# Altium PCB PreAvionicDesign.PcbDoc
Units mm, origin at the board's own origin, x right, y up, seen from the top; angles counter-clockwise.
Board outline 55 x 70 mm, 2 copper layers (Top Layer, Bottom Layer); 40 components, 27 nets, 185 pads, 38 vias.
Unrouted connection lines stored in the file: 2.
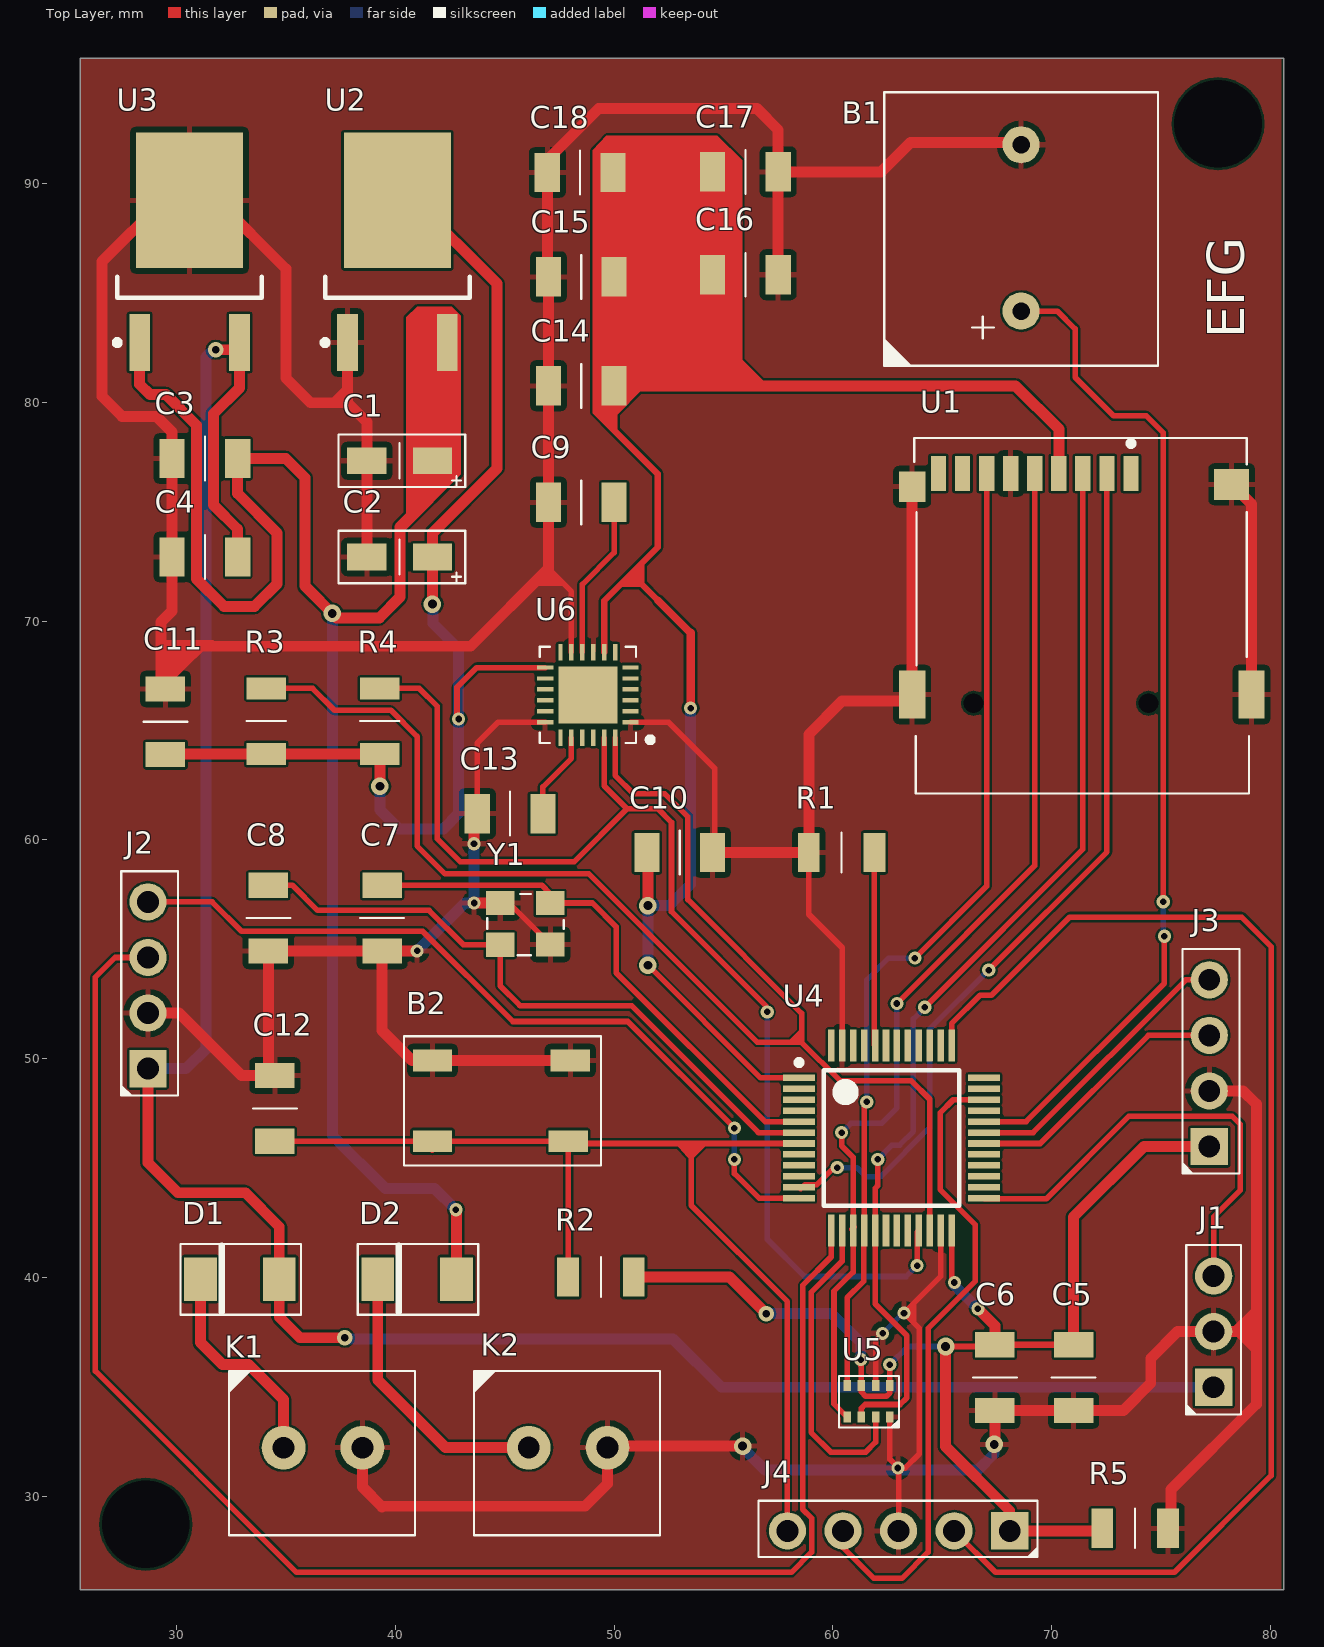
[diagram p0: Top Layer view]
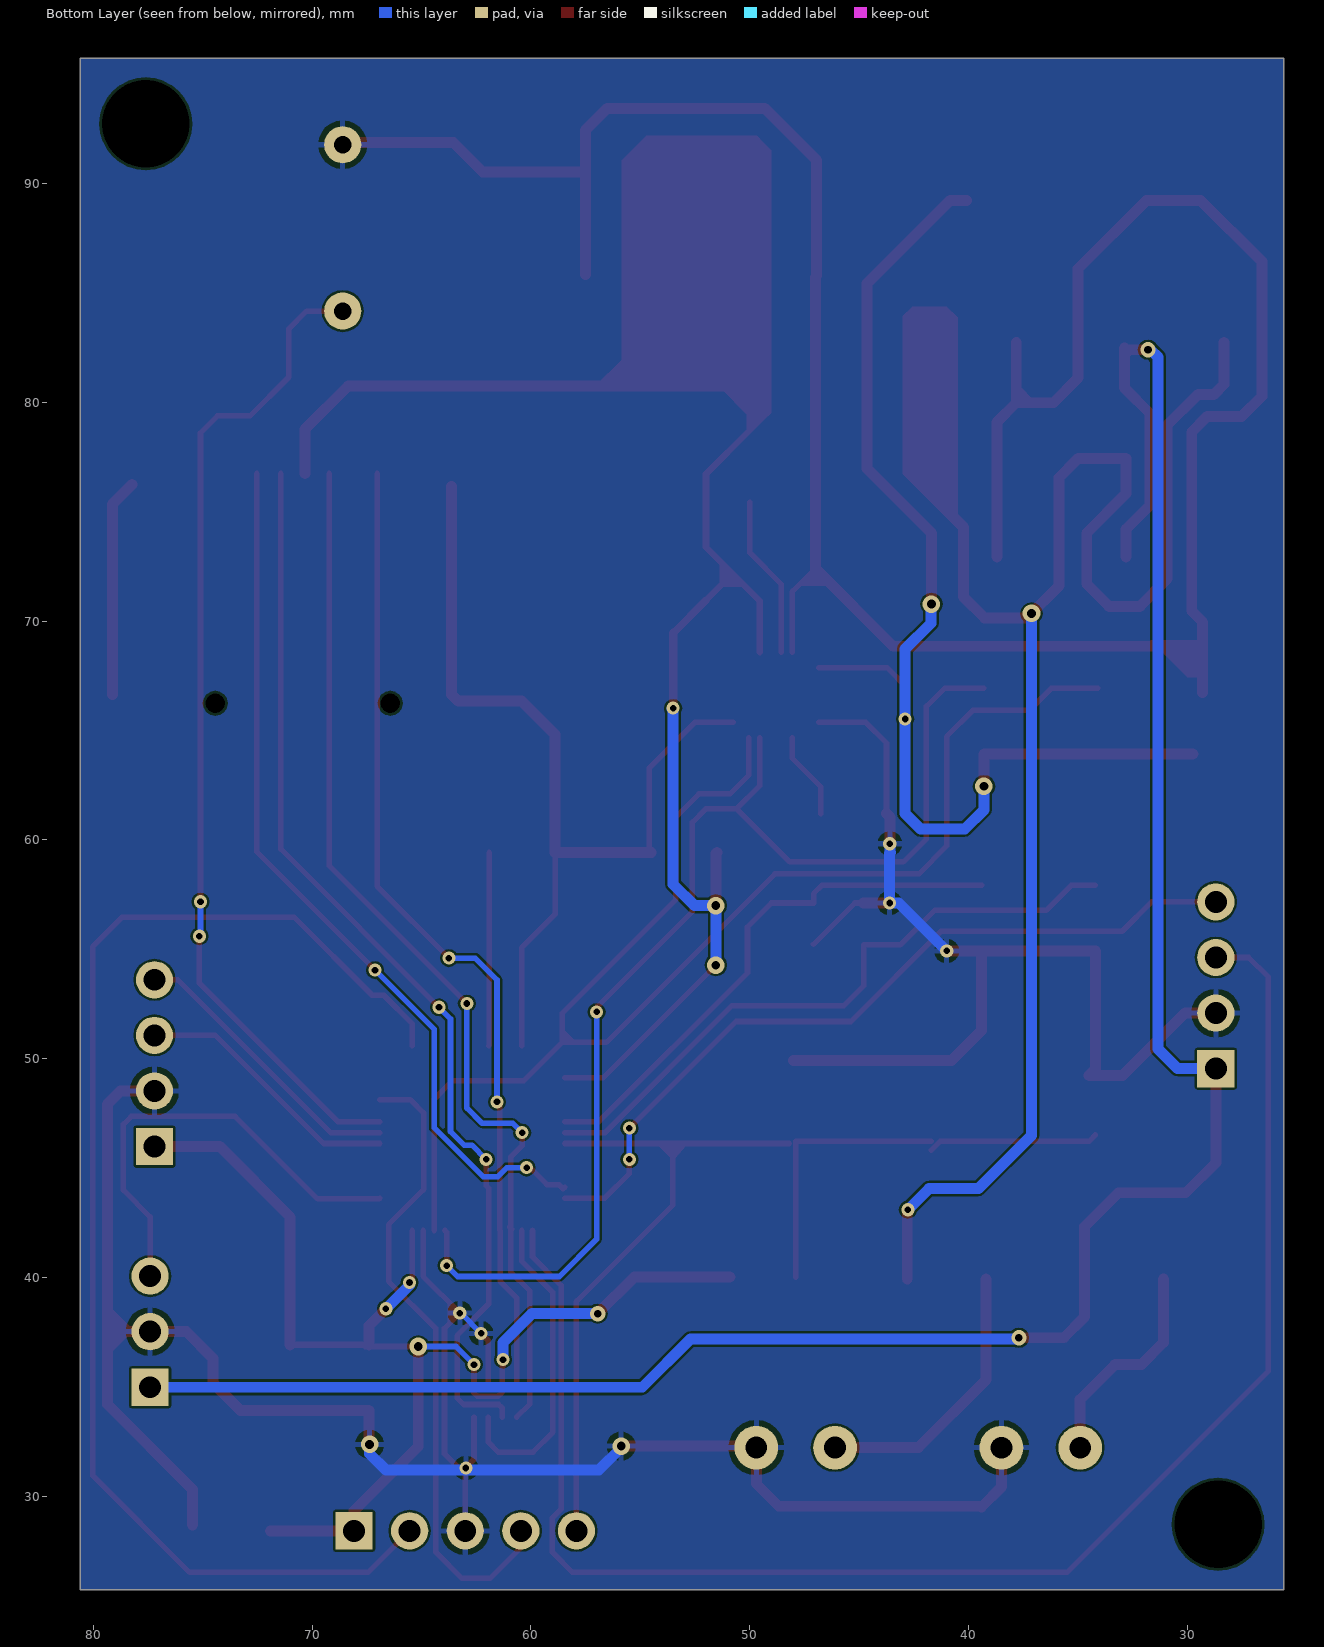
[diagram p1: Bottom Layer view, seen from below]
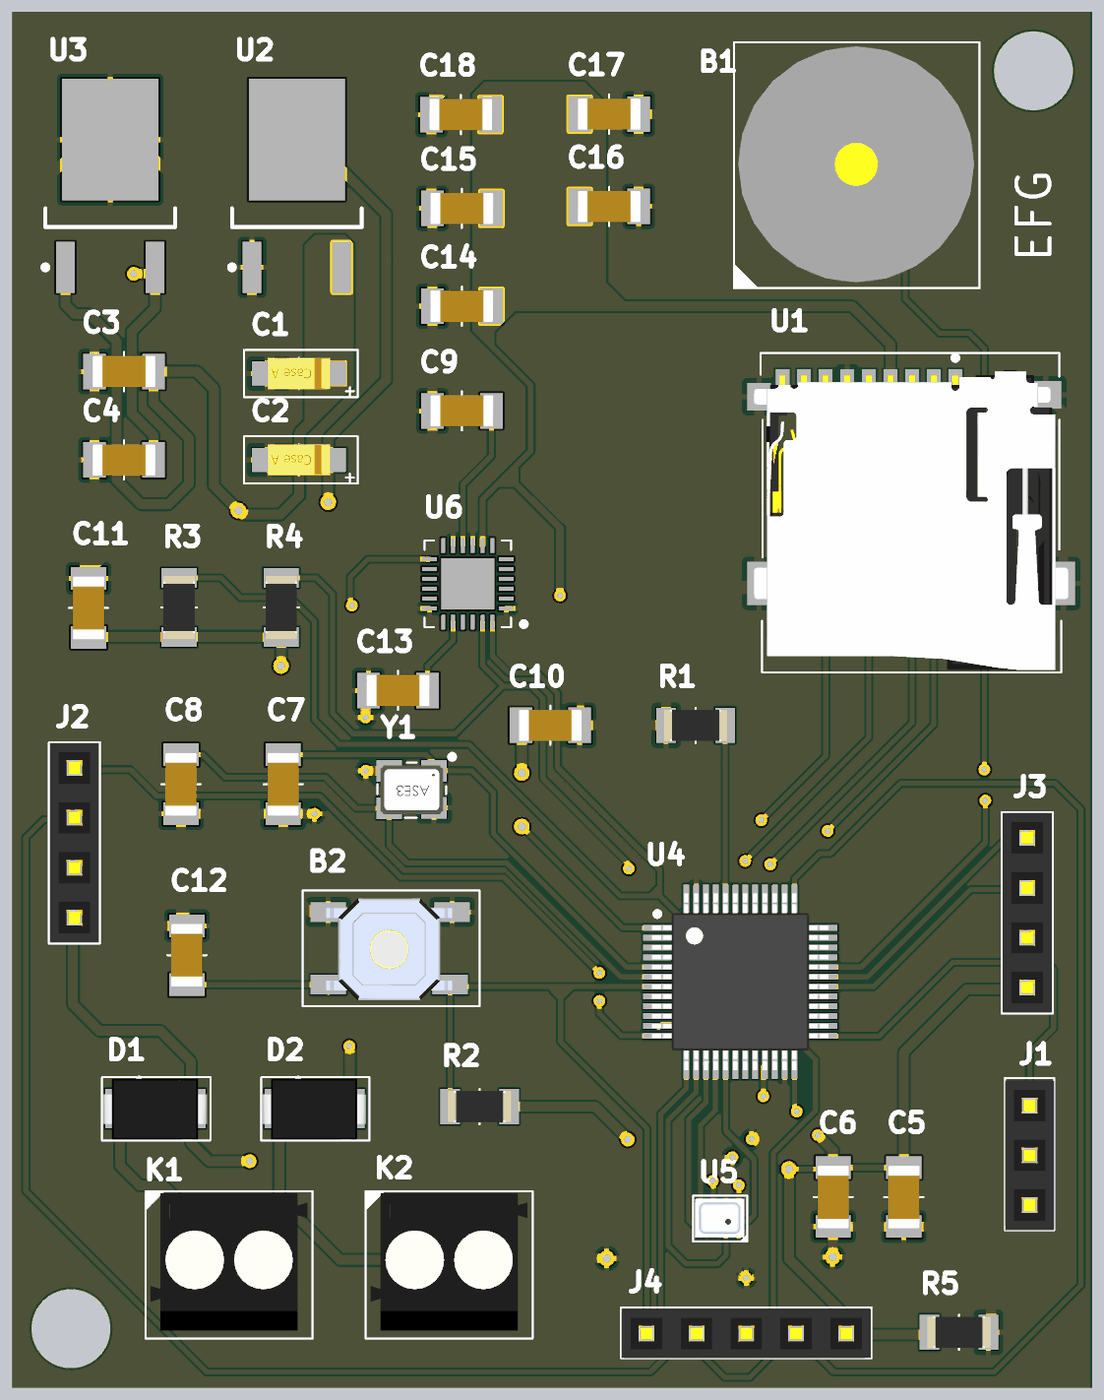
[diagram p2: 3D render of the assembled board from above, using the file's embedded part models]

## Layer stack, top to bottom
Top Solder: solder mask 0.0102, Solder Resist, Dk 3.5
Top Layer: signal copper 0.0356
Dielectric 1: dielectric 0.32, FR-4, Dk 4.8
Bottom Layer: signal copper 0.0356
Bottom Solder: solder mask 0.0102, Solder Resist, Dk 3.5

## Board outline
25.602,25.729 80.602,25.729 80.602,95.729 25.602,95.729

## Design rules (kind name [scope] priority, off if disabled: settings)
Clearance [All] p1: gap=0.1 ignorepadtopadclearanceinfootprint=FALSE except(0: Arc-Hole Track-Hole SMDPad-Hole THPad-Hole Via-Hole Fill-Hole Poly-Hole Region-Hole Text-Hole)
PolygonConnect [All] p1: connectstyle=Relief reliefconductorwidth=0.254 reliefentries=4 polygonreliefangle="90 Angle" airgapwidth=0.254
RoutingVias [All] p1: holewidth=0.3 width=0.6 viastyle="Through Hole" minholewidth=0.6 minwidth=0.3 maxholewidth=0.5 maxwidth=1
SolderMaskExpansion [All] p1: expansion=0.102
Width [All] p1: maxlimit=0.7 minlimit=0.254 preferedwidth=0.254 minimp=50.000000 maximp=50.000000 favimp=50.000000
30 further rules are at their usual default settings.

## Components (designator, comment, footprint, x,y, rotation, side; value= is the part's Value field where it differs from the comment)
B1 "BUZZER MİNİ 5V" "BUZZER MİNİ" 68.601,84.17 r90 top
B2 "Push Button" PUSH_BUTTON 47.902,46.229 r180 top
C1 "10 uF Tantal" C1206-tantal 41.702,77.329 r180 top
C2 "10 uF Tantal" C1206-tantal 41.702,72.929 r180 top
C3 "330 nF C1206" c1206 31.302,77.429 r180 top
C4 "0.1 uF C1206" c1206 31.302,72.929 r180 top
C5 "0.1 uF C1206" c1206 71.002,35.429 r270 top
C6 "0.1 uF C1206" c1206 67.402,35.429 r270 top
C7 "16 pF C1206" c1206 39.402,56.429 r90 top
C8 "16 pF C1206" c1206 34.202,56.429 r90 top
C9 "0.1 uF C1206" c1206 48.502,75.429 r180 top
C10 "0.1 uF C1206" c1206 53.002,59.429 r0 top
C11 "0.1 uF C1206" c1206 29.5,65.402 r90 top
C12 "0.1 uF C1206" c1206 34.502,47.729 r90 top
C13 "2.2 nF C1206" c1206 45.25,61.202 r180 top
C14 "0.1 uF C1206" c1206 48.5,80.752 r180 top
C15 "0.1 uF C1206" c1206 48.502,85.729 r180 top
C16 "0.1 uF C1206" c1206 56.002,85.829 r0 top
C17 "0.1 uF C1206" c1206 56.002,90.529 r0 top
C18 "0.1 uF C1206" c1206 48.45,90.502 r180 top
D1 "1N4007 DİODE" 1N4007 32.902,39.929 r0 top
D2 "1N4007 DİODE" 1N4007 41.002,39.929 r0 top
J1 "HEADER1X3" "HEADER 1X3" 77.402,34.989 r90 top
J2 "HEADER 1X4" "Header 1x4" 27.977,50.049 r90 top
J3 "HEADER 1X4" "Header 1x4" 76.477,46.489 r90 top
J4 "HEADER 1x5" "Header 1x5" 68.082,28.429 r180 top
K1 "KLEMENS 1X2" "KLEMENS 1X2" 34.9,32.227 r0 top
K2 "KLEMENS 1X2" "KLEMENS 1X2" 46.102,32.229 r0 top
R1 "10K R1206" R1206 60.4,59.427 r180 top
R2 "10K R1206" R1206 49.4,40.027 r0 top
R3 "4.7K R1206" R1206 34.102,65.429 r270 top
R4 "4.7K R1206" R1206 39.302,65.429 r270 top
R5 "10K R1206" R1206 73.808,28.544 r180 top
U1 "MİCRO SD CARD HOLDER" "Micro SD Card Holder" 70.941,69.671 r0 top
U2 "LD108633 / 3.3V Regülatör" "LD108633 / DPAK - duplicate" 40.102,86.879 r90 top
U3 "L7805 DPAK" "L7805 / DPAK" 30.602,86.879 r90 top
U4 "STM32F101 / 48 PİN" LQFP48-STM 58.486,50.57 r0 top
U5 "BMP280" BMP280 62.602,33.629 r270 top
U6 "MPU6050" "MPU6050 / QFN" 48.802,66.629 r180 top
Y1 "8 MHz 12.5 pf Osc" "8 MHz OSC" 46.102,56.629 r180 top

## Footprints (in the part's own frame and the unit in brackets; to place one, negate y for a bottom-side part, rotate by r counter-clockwise, add the part's x,y. Pads: shape width x height; smd on the part's side, far side on the other; paste and mask are expansions set on the pad)
1N4007 [mm]
  rect 1.5x2 smd mask+0.05: 1(-1.8,0) 2(1.8,0)
  silkscreen extent -2.72,-1.63 2.79,1.6, body extent -2.68,-1.59 2.62,1.52, height 2.2
"8 MHz OSC" [mm]
  rect 1.3x1.1 smd mask+0.05: 1(-0.981,-0.49) 2(1.303,-0.49) 3(1.303,1.417) 4(-0.986,1.401)
  round 0.5 on Top Overlay mask+0.102: 14(-1.9,-1.2)
  silkscreen extent -1.6,-0.9 1.9,1.9, body extent -1.45,-0.77 1.75,1.73, height 1.38
BMP280 [mm] "BMP280 / SENSÖR"
  rect 0.5x0.35 smd mask+0.05: 1(0,0) 2(0,-0.65) 3(0,-1.3) 4(0,-1.95) 5(-1.45,-1.95) 6(-1.45,-1.3) 7(-1.45,-0.65) 8(-1.45,0)
  silkscreen extent -1.88,-2.32 0.48,0.43, body extent -1.72,-2.23 0.28,0.27, height 0.95
"BUZZER MİNİ" [mm] "BUZZER MİNİ 5V"
  round 1.7 hole 0.8 mask+0.05: 1(0,0) 2(7.6,0)
  silkscreen extent -2.5,-6.25 10,6.25, body extent -2.2,-5.97 9.8,6.03, height 9.5
c1206 [mm]
  rect 1.15x1.8 smd mask+0.102: 1(-1.5,0) 2(1.5,0)
  silkscreen extent 0,-1 0,1, body extent -1.6,-0.8 1.6,0.8, height 1
C1206-tantal [mm]
  rect 1.8x1.23 smd mask+0.05: 1(0,0) 2(3,0)
  silkscreen extent -1.5,-1.2 4.3,1.2, body extent -0.1,-0.8 3.1,0.8, height 1.62
"HEADER 1X3" [mm] "HEADER 1X3 SERVO"
  rect 1.7x1.7 hole 1 mask+0.05: 1(0,0)
  round 1.7 hole 1 mask+0.05: 2(2.54,0) 3(5.08,0)
  silkscreen extent -1.25,-1.25 6.5,1.25, body extent -1.25,-1.25 6.37,1.25, height 9.1
"Header 1x4" [mm] "Header 1x4 2.54mm"
  rect 1.7x1.7 hole 1 mask+0.05: 1(-0.5,-0.725)
  round 1.7 hole 1 mask+0.05: 2(2.04,-0.725) 3(4.58,-0.725) 4(7.12,-0.725)
  silkscreen extent -1.73,-2.1 8.52,0.52, body extent -1.68,-2.05 8.48,0.45, height 9.1
"Header 1x5" [mm]
  rect 1.7x1.7 hole 1 mask+0.05: 1(0,0)
  round 1.7 hole 1 mask+0.05: 2(2.54,0) 3(5.08,0) 4(7.62,0) 5(10.16,0)
  silkscreen extent -1.28,-1.37 11.48,1.22, body extent -1.25,-1.3 11.45,1.2, height 9.1
"KLEMENS 1X2" [mm] "KLEMENS 1X2 3.5mm"
  round 2 hole 1 mask+0.05: 1(0,0) 2(3.6,0)
  silkscreen extent -2.5,-4 6,3.5, body extent -2.25,-3.6 5.75,3.4, height 8.9
"L7805 / DPAK" [mm] "L7805 / SMD /3PİN"
  rect 2.6x0.95 smd: 1(-4.15,2.28) 2(-4.15,-2.28)
  rect 6.2x4.9 smd: 3(2.35,0)
  silkscreen extent -4.27,-3.3 -1.15,3.43, body extent -2.1,-3.3 4.1,3.3, height 2.4
"LD108633 / DPAK - duplicate" [mm] "LD108633 / DPAK / 3.3V"
  rect 2.6x0.95 smd: 1(-4.15,2.28) 2(-4.15,-2.28)
  rect 6.2x4.9 smd: 3(2.35,0)
  silkscreen extent -4.27,-3.3 -1.15,3.43, body extent -2.1,-3.3 4.1,3.3, height 2.4
LQFP48-STM [mm] "LQFP48-STM / 48pin"
  rect 1.45x0.3 smd mask+0.05: 1(-0.034,-1.441) 2(-0.034,-1.941) 3(-0.034,-2.441) 4(-0.034,-2.941) 5(-0.034,-3.441) 6(-0.034,-3.941) 7(-0.034,-4.441) 8(-0.034,-4.941) 9(-0.034,-5.441) 10(-0.034,-5.941) 11(-0.034,-6.441) 12(-0.034,-6.941) 25(8.416,-6.941) 26(8.416,-6.441) 27(8.416,-5.941) 28(8.416,-5.441) 29(8.416,-4.941) 30(8.416,-4.441) 31(8.416,-3.941) 32(8.416,-3.441) 33(8.416,-2.941) 34(8.416,-2.441) 35(8.416,-1.941) 36(8.416,-1.441)
  rect 0.3x1.45 smd mask+0.05: 13(1.441,-8.416) 14(1.941,-8.416) 15(2.441,-8.416) 16(2.941,-8.416) 17(3.441,-8.416) 18(3.941,-8.416) 19(4.441,-8.416) 20(4.941,-8.416) 21(5.441,-8.416) 22(5.941,-8.416) 23(6.441,-8.416) 24(6.941,-8.416) 37(6.941,0.034) 38,(6.441,0.034) 39(5.941,0.034) 40(5.441,0.034) 41(4.941,0.034) 42(4.441,0.034) 43(3.941,0.034) 44(3.441,0.034) 45(2.941,0.034) 46(2.441,0.034) 47(1.941,0.034) 48(1.441,0.034)
  silkscreen extent -0.16,-7.29 7.29,-0.62, body extent -0.31,-8.69 8.69,0.31, height 1.6
"Micro SD Card Holder" [mm]
  rect 0.7x1.6 smd paste+0 mask+0: 1(2.684,7.075) 2(1.584,7.075) 3(0.484,7.075) 4(-0.616,7.075) 5(-1.716,7.075) 6(-2.816,7.075) 7(-3.916,7.075) 8(-5.016,7.075) Cd(-6.116,7.075)
  rect 1.2x1.4 smd paste+0 mask+0: 10(-7.316,6.475)
  rect 1.6x1.4 smd paste+0 mask+0: 11(7.284,6.575)
  rect 1.2x2.2 smd paste+0 mask+0: 12(-7.316,-3.025) 13(8.184,-3.025)
  round 0 hole 0.9 unplated paste-1000 mask+0: ""(-4.516,-3.425) ""(3.484,-3.425)
  silkscreen extent -7.22,-7.55 8.08,8.7, body extent -7.57,-7.42 8.43,7.83, height 1.85
"MPU6050 / QFN" [mm] "QFN, 24-Leads, Body 4,00x4,00mm, Pitch 0,50mm, Thermal Pad 2,70x2,60mm, IPC Medium Density"
  rect 0.75x0.2 smd: 1(-1.95,1.25) 2(-1.95,0.75) 3(-1.95,0.25) 4(-1.95,-0.25) 5(-1.95,-0.75) 6(-1.95,-1.25) 13(1.95,-1.25) 14(1.95,-0.75) 15(1.95,-0.25) 16(1.95,0.25) 17(1.95,0.75) 18(1.95,1.25)
  rect 0.2x0.75 smd: 7(-1.25,-1.95) 8(-0.75,-1.95) 9(-0.25,-1.95) 10(0.25,-1.95) 11(0.75,-1.95) 12(1.25,-1.95) 19(1.25,1.95) 20(0.75,1.95) 21(0.25,1.95) 22(-0.25,1.95) 23(-0.75,1.95) 24(-1.25,1.95)
  rect 2.7x2.6 smd: 25(0,0)
  silkscreen extent -2.98,-2.2 2.2,2.2, body extent -2.05,-2.05 2.05,2.05, height 0.9
PUSH_BUTTON [mm]
  rect 1.8x1 smd mask+0.05: 1(0,0) 2(6.2,0) 3(-0.1,-3.7) 4(6.2,-3.7)
  silkscreen extent -1.5,-4.8 7.5,1.1, body extent -0.1,-4.4 6.3,0.8, height 1.5
R1206 [mm]
  rect 1x1.8 smd mask+0.05: 1(-1.5,0) 2(1.5,0)
  silkscreen extent 0,-0.9 0,0.9, body extent -1.6,-0.8 1.6,0.81, height 0.55

## Part data
B1: "BUZZER 5V"
B2: "SMD Push Button"
C4 C5 C6 C9 C10 C11 C12 C14 C15 C16 C17 C18: "0.1 uF 1206"
J1: "Header 1x3 2.54mm"
J2 J3: "Header1x4 2.54mm"
J4: "Header 1x5 2.54mm"
K1 K2: "KLEMANS 1X22 3.6mm"
U1: "MICRO SD CARD HOLDER"
U2: library part LD108633, "LD108633 / 3.3 REG"
U3: "L7805 / 5V Regülatör"
U4: library part STM32F101
U5: "BMP280 SENSOR"
U6: "MPU6050 SENSOR"

## Free pads (board coordinates)
  round 3 hole 4 mask+0: x1(77.6,92.727) x2(28.6,28.727)

## Via types
v1: diameter 0.6, hole 0.3, Top Layer to Bottom Layer, 27 vias
v2: diameter 0.8, hole 0.4, Top Layer to Bottom Layer, 8 vias
v3: diameter 0.7, hole 0.35, Top Layer to Bottom Layer, 3 vias

## Nets (pads, with @x,y where several pads share a name; then routed paths per layer and width w, separated by ;. In a path a pad name is that pad's centre, name@x,y a point inside that pad or via, vN(x,y) a via of type N, cw(c..) or ccw(c..) an arc to the next point about the centre after c; other vN are vias at no path point)
"3.3 V": C2.1 C5.1 C6.1 C10.1 C11.1 C14.1 C15.1 C16.1 C17.1 C18.1 J3.1 J4.1 R2.2 R3.2 R4.2 R5.2 U1.4 U2.3 U4.1 U4.24 U5.6 U5.8 U6.8 U6.13 | length 200.5
  Top Layer w0.254: v1(42.9,65.527) 42.825,65.602 42.825,66.977 43.727,67.879 U6.13 ; v2(51.55,54.277) 56.698,49.129 U4.1 ; v1(61.275,36.252) 61.275,35.977 61.302,35.95 U5.6 61.302,34.775 61.5,34.577 62.45,34.577 62.602,34.729 U5.8 62.602,36.025 v1(62.6,36.027) ; v2(65.15,36.852) 67.573,36.852 C6.1@67.65,36.929 ; U4.24 65.427,39.9 v1(65.55,39.777)
  Top Layer w0.3: U6.8 49.552,70.929 50.788,72.164 ; C14.1 50,78.727 52,76.727 52,73.377 50.788,72.164 ; 52,70.952 50.788,72.164 ; C6.1@67.65,36.929 C5.1
  Top Layer w0.35: 52,70.952 53.5,69.452
  Top Layer w0.4: v1(53.5,66.027) 53.5,69.452
  Top Layer w0.5: C11.1@29.75,63.929 R3.2 R4.2 39.302,62.454 v2(39.3,62.452) ; U2.3 40.848,89.229 44.65,85.427 44.65,76.977 41.702,74.029 C2.1 41.702,70.779 v2(41.7,70.777) ; C18.1 54.475,90.502 C17.1 C16.1 54.402,85.729 C15.1 50.002,80.754 C14.1 68.35,80.752 70.325,78.777 U1.4 ; R2.2 55.273,40.029 v3(56.95,38.352) ; C10.1 51.55,59.381 v2(51.55,57.002) ; v2(65.15,36.852) 65.15,32.277 68.082,29.345 J4.1 R5.2@71.903,28.429 ; v1(66.625,38.577) 67.402,37.8 C6.1 ; C5.1 71.002,42.779 74.212,45.989 J3.1
  Bottom Layer w0.254: v1(62.6,36.027) 63.425,36.852 v2(65.15,36.852) ; v1@65.55,39.652 v1(65.55,39.777)
  Bottom Layer w0.5: v2(39.3,62.452) 39.3,61.377 40.175,60.502 42.2,60.502 42.9,61.202 v1(42.9,65.527) 42.9,68.727 41.725,69.902 41.725,70.752 v2(41.7,70.777) ; v2(51.55,54.277) v2(51.55,57.002) 52.525,57.002 53.5,57.977 53.5,65.927 53.55,65.977 v1(53.5,66.027) ; v3(56.95,38.352) 59.95,38.352 61.275,37.027 v1(61.275,36.252) ; v1@65.55,39.652 v1(66.625,38.577)
5V: C4.1 D1.2 J1.1 J2.1 U3.2 | length 106.6
  Top Layer w0.5: J2.1 28.702,45.25 30.075,43.877 33.15,43.877 34.702,42.325 D1.2 34.702,38.2 35.65,37.252 v3(37.7,37.252) ; v3(31.8,82.402) 32.657,82.402 32.732,82.327 32.882,82.477 32.882,80.659 31.7,79.477 31.7,75.302 32.802,74.2 C4.1
  Bottom Layer w0.5: J2.1 30.447,49.549 31.35,50.452 31.35,82.077 31.675,82.402 v3(31.8,82.402) ; v3(37.7,37.252) 37.75,37.202 52.7,37.202 54.913,34.989 J1.1
7.4V: C1.1 C3.1 D2.2 U2.2 U3.1 | length 83.7
  Top Layer w0.5: U3.1 28.322,80.824 28.794,80.352 29.525,80.352 30.925,78.952 30.925,71.927 32.175,70.677 33.575,70.677 34.6,71.702 34.6,74.027 32.802,75.825 C3.1 34.998,77.429 35.875,76.552 35.875,71.602 37.325,70.152 39.275,70.152 40.225,71.102 40.225,74.302 41.702,75.779 C1.1 41.702,79.604 42.382,80.284 U2.2 ; v1(42.775,43.102) 42.802,43.075 D2.2
  Bottom Layer w0.5: v2(37.125,70.352) 37.125,46.502 39.55,44.077 41.8,44.077 v1(42.775,43.102)
GND: B1.2 B2.3 B2.4 C1.2 C2.2 C3.2 C4.2 C5.2 C6.2 C7.1 C8.1 C9.2 C10.2 C11.2 C12.2 C13.2 C14.2 C15.2 C16.2 C17.2 C18.2 J1.2 J2.2 J3.2 J4.3 K1.2 K2.2 R1.2 R5.1 U1.6 U1.10 U1.11 U1.12 U1.13 U2.1 U3.3 U4.23 U4.47 U5.1 U5.7 U6.1 U6.9 U6.11 U6.18 Y1.2 Y1.4 | length 323.3
  Top Layer w0.254: C13.2 43.75,64.427 44.702,65.379 U6.18 ; Y1.2 45.197,57.119 Y1.4 ; 47.002,72.404 48.052,71.354 U6.11 ; U6.1 52.498,65.379 54.6,63.277 54.6,59.527 C10.2 ; R1.2@58.898,59.429 58.898,56.604 60.427,55.075 U4.47 ; U5.7 61.952,37.129 v1(62.275,37.452) ; U5.1 62.602,31.7 v1@63.002,31.3 ; v1(62.973,31.3) v1@63.002,31.3 ; J4.3 v1@63.002,31.3 ; U4.23 64.927,40.054 v1(63.25,38.377) 63.95,37.677 63.95,31.952 63.298,31.3 v1@63.002,31.3
  Top Layer w0.5: J2.2 30.113,52.089 32.973,49.229 C12.2 34.202,49.529 C8.1 C7.1 ; C11.2@29.302,66.729 29.302,67.504 ; U2.1 37.822,79.98 ; K1.2 38.5,30.427 39.4,29.527 39.425,29.552 48.675,29.552 49.702,30.579 K2.2 49.775,32.302 v2(55.875,32.302) ; C2.2 C1.2 38.702,79.1 37.822,79.98 ; v1(41,54.927) 40.998,54.929 C7.1 ; v1(43.6,59.827) 43.6,61.052 C13.2 ; v1(43.608,57.119) Y1.2 ; B2.3 B2.4 40.773,49.929 39.402,51.3 C7.1 ; C10.2 58.898,59.429 R1.2 58.9,64.827 60.425,66.352 63.331,66.352 U1.12 U1.10 ; C16.2 C17.2 ; v2(67.375,32.377) 67.402,32.404 C6.2 C5.2 73.277,33.929 74.525,35.177 74.525,36.302 75.752,37.529 J1.2 78.427,37.529 ; B1.2@68.601,91.876 63.549,91.876 62.202,90.529 C17.2 ; R5.1@75.459,28.702 75.459,30.322 79.35,34.213 79.35,36.727 78.548,37.529 78.427,37.529 ; J3.2 78.748,48.529 79.35,47.927 79.35,38.452 78.427,37.529 ; U1.11 79.125,75.346 U1.13 ; 29.302,67.504 30.65,68.852 43.45,68.852 47.002,72.404 C9.2 47,75.431 C14.2 47.002,80.754 C15.2 46.95,85.781 C18.2 46.95,91.077 49.3,93.427 56.525,93.427 57.502,92.45 C17.2 ; 29.302,67.504 29.302,69.954 29.802,70.454 C4.2 C3.2 29.802,78.65 29.1,79.352 27.525,79.352 26.6,80.277 26.6,86.427 29.402,89.229 U3.3 31.873,89.229 35,86.102 35,81.102 36.122,79.98 37.822,79.98
  Bottom Layer w0.254: v1(62.275,37.452) 63.2,38.377 v1(63.25,38.377) ; v1@62.875,31.202 v1(62.973,31.3)
  Bottom Layer w0.5: v1(41,54.927) 43.192,57.119 v1(43.608,57.119) 43.608,59.394 43.575,59.427 43.6,59.452 v1(43.6,59.827) ; v2(55.875,32.302) 55.875,32.227 56.9,31.202 62.875,31.202 66.625,31.202 67.375,31.952 v2(67.375,32.377)
NetB1_1: B1.1 U4.32 | length 46.1
  Top Layer w0.254: U4.32 68.827,47.129 75.15,53.452 v1(75.15,55.602) ; B1.1 70.252,84.17 71.068,83.354 71.068,81.145 72.836,79.377 74.325,79.377 75.1,78.602 v1(75.1,57.177)
  Bottom Layer w0.254: v1(75.1,57.177) 75.1,55.652 v1(75.15,55.602)
NetB2_1: B2.1 B2.2 C12.1 J4.5 R2.1 U4.7 | length 50
  Top Layer w0.254: C12.1@34.202,46.529 C12.1 41.302,46.229 B2.2@41.702,45.829 ; B2.2 B2.1 R2.1@47.902,40.029 ; B2.1@48.202,46.129 53.527,46.129 ; J4.5 57.922,38.909 53.527,43.304 53.527,46.129 ; U4.7 53.527,46.129
NetC7_2: C7.2 U4.5 Y1.1 | length 25
  Top Layer w0.254: C7.2 46.702,57.929 47.083,57.548 Y1.1 49.012,57.119 50.102,56.029 50.102,53.929 56.902,47.129 U4.5
NetC8_2: C8.2 U4.6 Y1.3 | length 30
  Top Layer w0.254: C8.2 35.302,57.929 36.452,56.779 41.552,56.779 43.119,55.212 Y1.3 44.799,53.332 45.702,52.429 50.802,52.429 56.602,46.629 U4.6
NetC9_1: C9.1 U6.10 | length 7.5
  Top Layer w0.254: U6.10 48.552,71.679 50.002,73.129 C9.1
NetC13_1: C13.1 U6.20 | length 4
  Top Layer w0.254: C13.1 46.75,62.427 48.052,63.729 U6.20
NetD1_1: D1.1 K1.1 | length 10
  Top Layer w0.5: D1.1 31.102,37.027 32.102,36.027 33.3,36.027 34.9,34.427 K1.1
NetD2_1: D2.1 K2.1 | length 12.8
  Top Layer w0.5: D2.1 39.202,35.325 42.298,32.229 K2.1
NetJ1_3: J1.3 U4.25 | length 20.9
  Top Layer w0.254: U4.25 66.929,43.602 69.75,43.602 73.519,47.371 78.256,47.371 78.625,47.002 78.625,44.002 77.402,42.779 J1.3
NetJ2_3: J2.3 U4.13 | length 73.1
  Top Layer w0.254: J2.3 27.202,54.629 26.302,53.729 26.302,35.725 35.498,26.529 58.102,26.529 59.026,27.453 59.026,29.01 58.621,29.415 58.621,39.648 59.927,40.954 U4.13
NetJ2_4: J2.4 U4.12 | length 36.7
  Top Layer w0.254: J2.4 31.637,57.169 32.977,55.829 41.252,55.829 45.377,51.704 50.627,51.704 v1(55.502,46.829) ; v1(55.502,45.404) 55.502,44.754 56.627,43.629 U4.12
  Bottom Layer w0.254: v1@55.402,45.504 v1(55.502,45.404) v1(55.502,46.829)
NetJ3_3: J3.3 U4.30 | length 12.3
  Top Layer w0.254: U4.30 69.477,46.129 74.417,51.069 J3.3
NetJ3_4: J3.4 U4.31 | length 13.2
  Top Layer w0.254: U4.31 69.152,46.629 76.132,53.609 J3.4
NetJ4_2: J4.2 U4.37 | length 59.5
  Top Layer w0.254: U4.37 65.427,51.604 66.725,52.902 67.25,52.902 70.825,56.477 78.675,56.477 80.025,55.127 80.025,30.951 75.601,26.527 67.444,26.527 J4.2 J4.2@65.602,28.489
NetJ4_4: J4.4 U4.34 | length 29.6
  Top Layer w0.254: J4.4 60.462,27.665 61.875,26.252 63.15,26.252 64.35,27.452 64.35,37.677 66.502,39.829 66.502,42.425 64.9,44.027 64.9,47.527 65.502,48.129 U4.34
NetR1_1: R1.1 U4.44 | length 8.8
  Top Layer w0.254: R1.1 61.9,50.631 U4.44
NetR3_1: R3.1 U4.22 U6.24 | length 65.3
  Top Layer w0.254: R3.1 36.223,66.929 37.225,65.927 39.8,65.927 41,64.727 41,59.727 42.275,58.452 48.85,58.452 56.55,50.752 58.575,50.752 ; U6.24 50.052,62.95 50.9,62.102 52.325,62.102 53.375,61.052 53.375,57.277 58.575,52.077 58.575,50.752 ; U4.22 64.427,48.15 63.575,49.002 60.325,49.002 58.575,50.752
NetR4_1: R4.1 U4.21 U6.23 | length 55.4
  Top Layer w0.254: R4.1 41.098,66.929 41.925,66.102 41.925,60.052 42.977,59 48.173,59 50.6,61.427 ; U6.23 49.552,62.475 50.6,61.427 ; v1(57,52.14) 57,52.277 56.925,52.352 56.962,52.389 52.625,56.727 52.625,60.802 52,61.427 50.6,61.427 ; v1(63.85,40.552) 63.85,42.077 U4.21
  Bottom Layer w0.254: v1(57,52.14) 57,41.752 58.7,40.052 63.35,40.052 v1(63.85,40.552)
NetU1_2: U1.2 U4.11 | length 40.8
  Top Layer w0.254: U4.11 58.529,44.052 58.729,44.252 59.271,44.252 60.046,45.027 v1(60.2,45.027) ; v1(67.125,54.052) 72.525,59.452 U1.2
  Bottom Layer w0.254: v1(60.2,45.027) 61.1,45.027 61.525,44.602 62.175,44.602 64.425,46.852 64.425,51.352 v1(67.125,54.052)
NetU1_3: U1.3 U4.17 U5.3 | length 49.7
  Top Layer w0.254: U5.3 61.302,34.029 61.475,34.202 63.075,34.202 63.375,34.502 63.375,37.356 61.927,38.804 U4.17 61.927,44.079 62.05,44.202 v1(62.05,45.402) ; v1(64.2,52.352) 71.425,59.577 U1.3
  Bottom Layer w0.254: v1(62.05,45.402) 62.7,46.052 63.05,46.052 63.675,46.677 63.675,51.827 v1(64.2,52.352)
NetU1_5: U1.5 U4.15 U5.4 | length 48.5
  Top Layer w0.254: v1(60.4,46.627) 60.4,46.027 60.927,45.5 60.927,42.354 60.975,42.306 60.875,42.206 U4.15 60.927,40.254 60.052,39.379 60.052,34.229 U5.4 ; v1(62.925,52.527) 69.225,58.827 U1.5
  Bottom Layer w0.254: v1(60.4,46.627) 60.825,47.052 62.225,47.052 62.925,47.752 v1(62.925,52.527)
NetU1_7: U1.7 U4.16 U5.5 | length 45
  Top Layer w0.254: U5.5 60.652,39.079 61.402,39.829 61.402,42.129 U4.16 61.427,47.904 v1(61.55,48.027) ; v1(63.746,54.602) 67.027,57.883 67.027,76.744 U1.7
  Bottom Layer w0.254: v1(61.55,48.027) 61.55,53.602 62.55,54.602 v1(63.746,54.602)
NetU4_14: U4.14 U5.2 | length 14.5
  Top Layer w0.254: U4.14 60.427,40.754 59.002,39.329 59.002,32.929 59.902,32.029 61.502,32.029 61.952,32.479 U5.2
pads on no net: U1. U1.1 U1.8 U1.Cd U4.2 U4.3 U4.4 U4.8 U4.9 U4.10 U4.18 U4.19 U4.20 U4.26 U4.27 U4.28 U4.29 U4.33 U4.35 U4.36 U4.38, U4.39 U4.40 U4.41 U4.42 U4.43 U4.45 U4.46 U4.48 U6.2 U6.3 U6.4 U6.5 U6.6 U6.7 U6.12 U6.14 U6.15 U6.16 U6.17 U6.19 U6.21 U6.22 U6.25 Y1.14

## Polygon pours and split planes (outlines as drawn)
GND on Top Layer "GND_L01_P000" (solid, pour order 0): 25.602,95.729 80.5,95.729 80.5,25.729 25.602,25.729
GND on Bottom Layer "GND_L02_P002" (solid, pour order 2): 25.6,95.725 25.6,25.725 25.625,25.75 80.6,25.75 80.6,95.725

## Other copper
Top Layer:
  region net "3.3 V": 51.378,71.574 51.381,71.577 51.381,72.758 50.197,71.574
  region net NetR3_1: 58,50.827 58.075,50.752 58.575,50.752 58.575,51.414 58,50.839
  region net NetB2_1: 52.8,46.129 54.3,46.129 53.527,45.356 53.527,45.327
  region net GND: 29.3,69.127 29.302,67.427 30,67.427 31.7,69.127
  region net GND: 37.822,80.927 37.822,79.98 36.9,79.98
  region net GND: 46.225,71.627 46.246,71.606 47.8,71.606 47.002,72.404 46.325,71.727 46.2,71.727
  region net GND: 63.8,38.927 63.8,37.827 63.25,38.377
  region net GND: 79.6,38.702 79.6,36.356 78.427,37.529
  region net 7.4V: 40.475,74.202 40.5,74.202 43,76.702 43,83.952 42.575,84.377 41,84.377 40.5,83.877 40.5,74.602
  region net "3.3 V": 49.65,92.177 54.725,92.177 55.85,91.052 55.85,81.952 57.125,80.677 51.375,80.677 50,79.302 50,79.152 49.975,79.177 49.35,79.177 49.025,79.502 49.025,91.527 49.35,91.852
  region net "3.3 V": 49.35,79.177 49.925,78.602 49.925,79.152 50,79.227

## Silkscreen, mask and mechanical layers (free items; w line width, h text height)
Top Overlay:
  text "EFG" at 78.8,82.927 h1.7 r90
Mechanical 1:
  lines w0.3: 25.602,25.729 25.602,95.75 80.602,95.75 80.602,25.729 25.602,25.729